# Altium PCB CC_EXP.PcbDoc
Units mm, origin at the board's own origin, x right, y up, seen from the top; angles counter-clockwise.
Board outline 30 x 30 mm, 2 copper layers (Top Layer, Bottom Layer), stack 1.569 mm thick; 4 components, 8 nets, 22 pads, 0 vias.
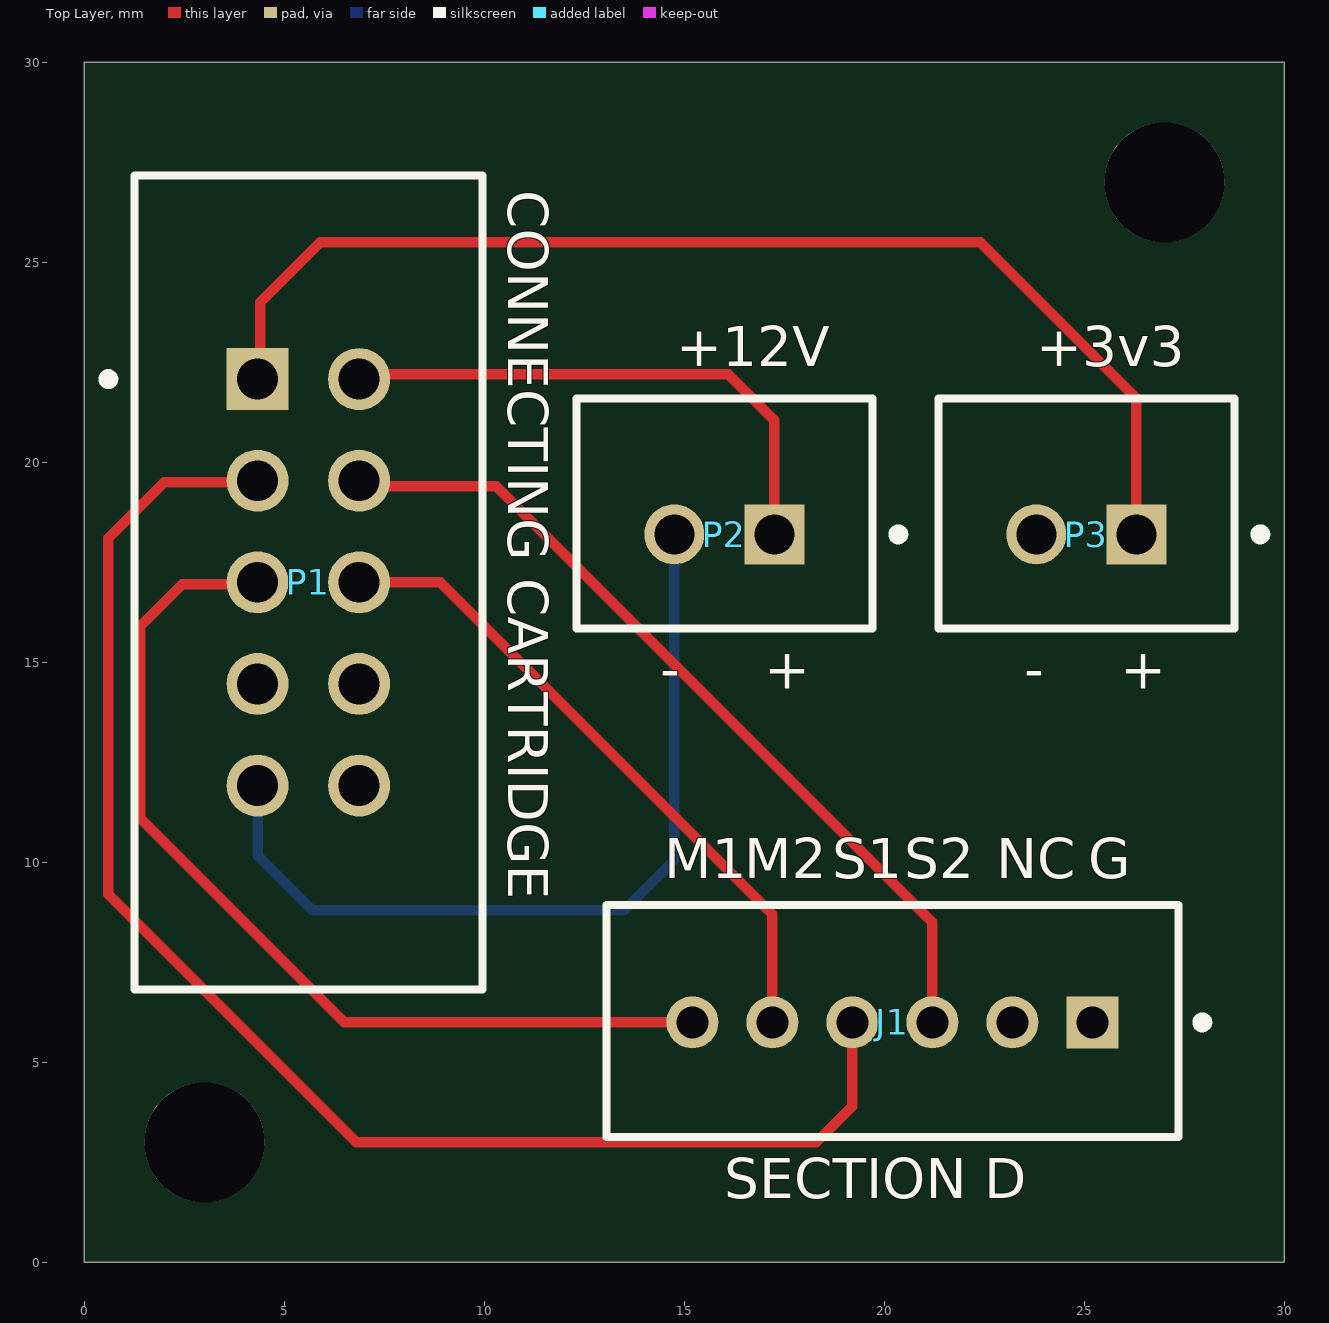
[diagram p0: Top Layer view]
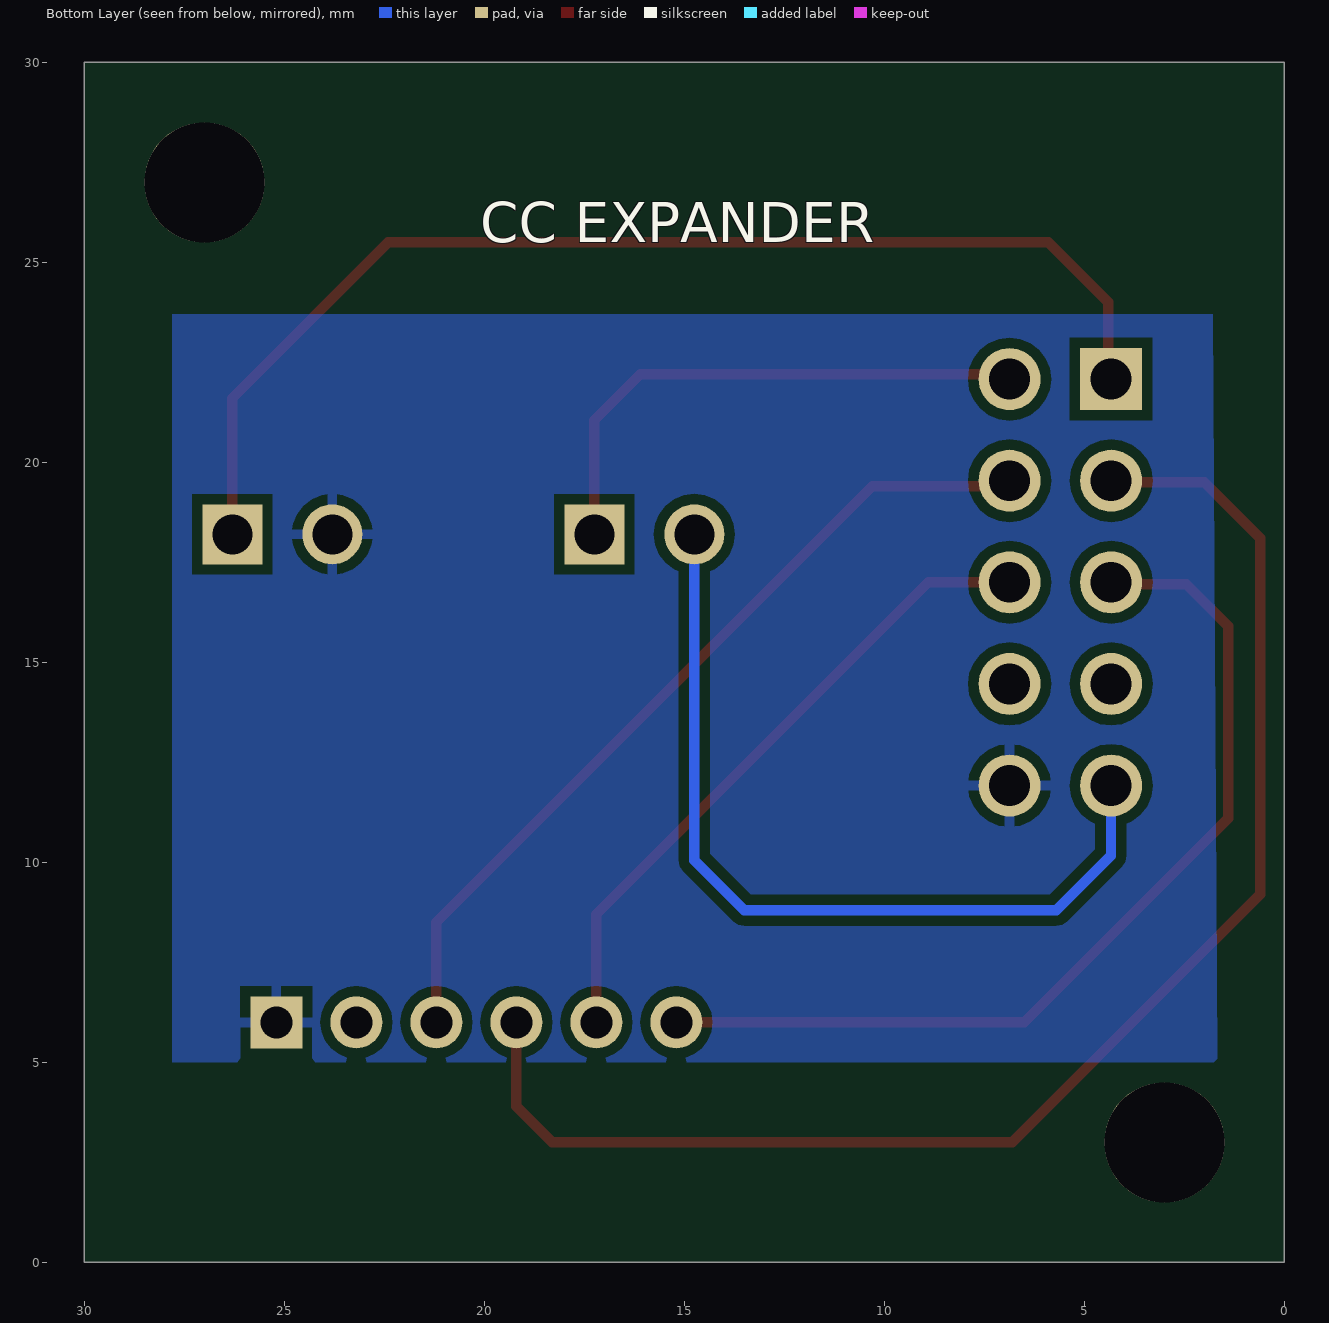
[diagram p1: Bottom Layer view, seen from below]
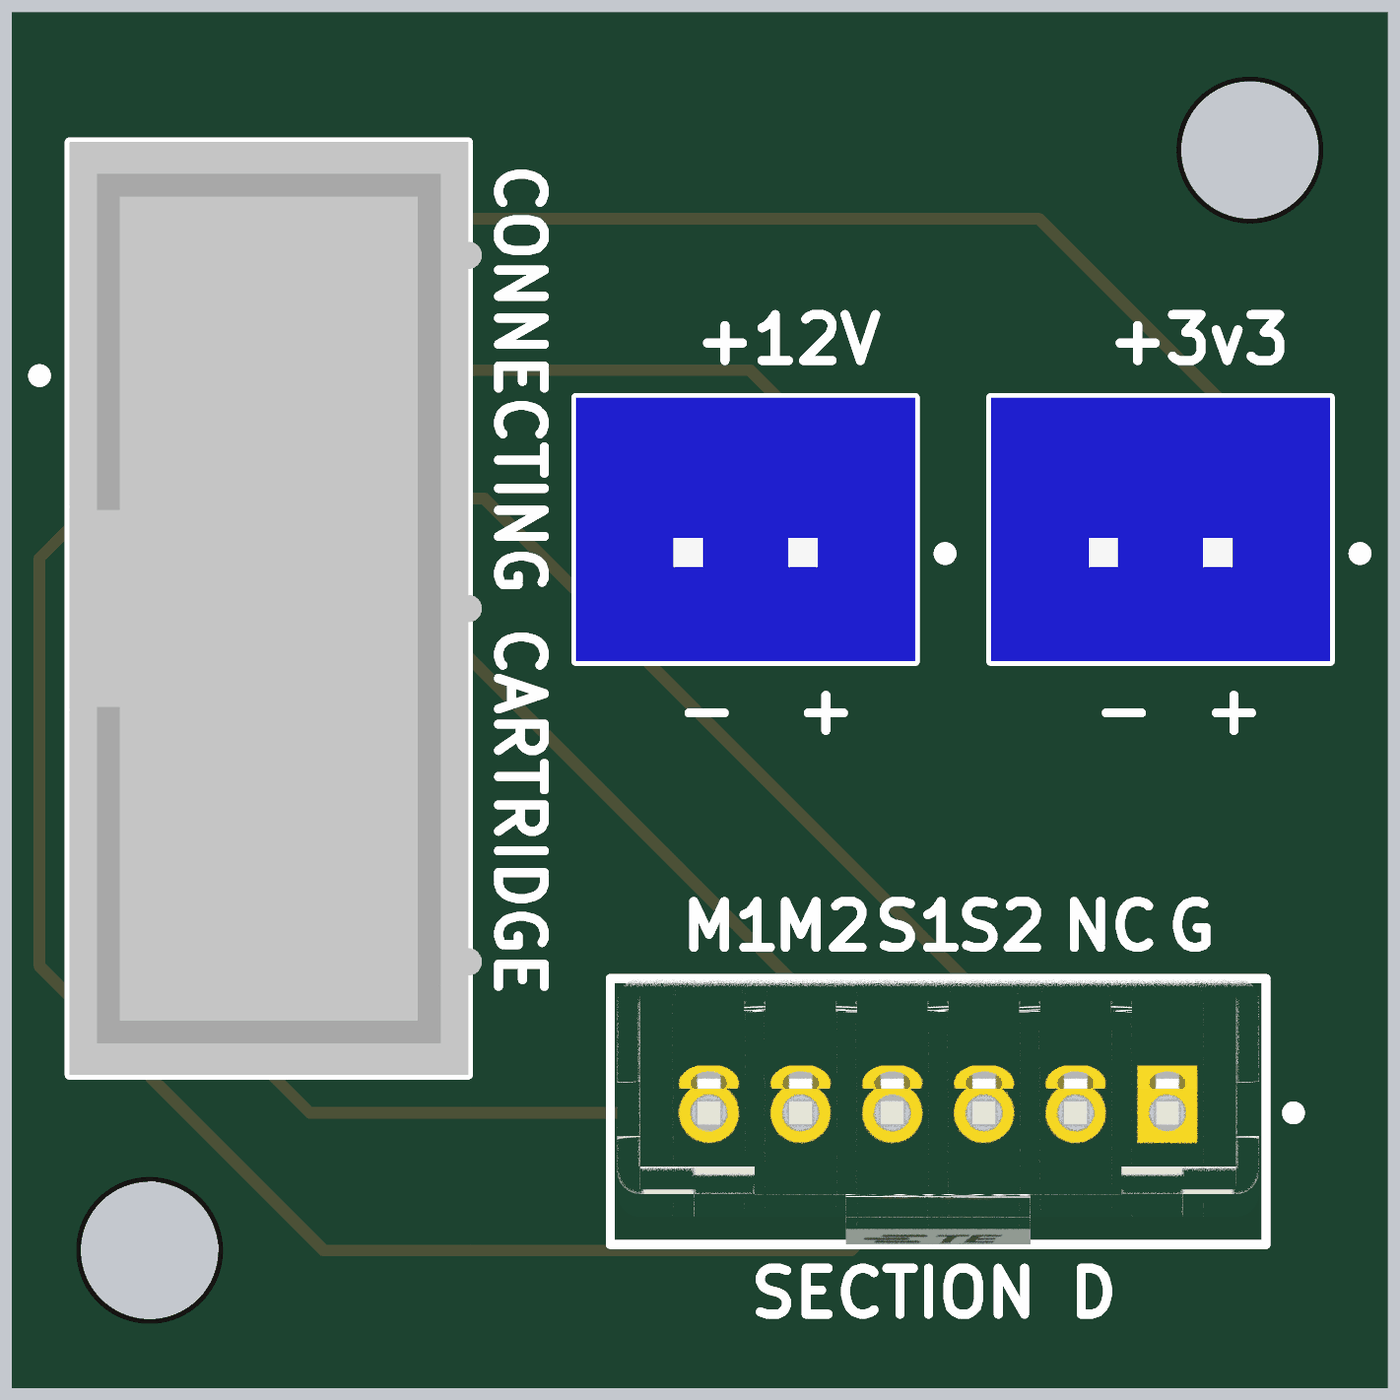
[diagram p2: 3D render of the assembled board from above, using the file's embedded part models]

## Layer stack, top to bottom
Top Solder: solder mask 0.0254, SM-001, Dk 4
Top Layer: signal copper 0.035
Dielectric 1: core 1.4986, Core-043, Dk 4.3
Bottom Layer: signal copper 0.035
Bottom Solder: solder mask 0.0254, SM-001, Dk 4

## Board outline
0,0 30,0 30,30 0,30

## Design rules (kind name [scope] priority, off if disabled: settings)
Clearance [All] p1: gap=0.254 ignorepadtopadclearanceinfootprint=FALSE except(0: Arc-Hole Track-Hole SMDPad-Hole THPad-Hole Via-Hole Fill-Hole Poly-Hole Region-Hole Text-Hole)
PolygonConnect [All] p1: connectstyle=Relief reliefconductorwidth=0.254 reliefentries=4 polygonreliefangle="90 Angle" airgapwidth=0.254
RoutingVias [All] p1: holewidth=0.711 width=1.27 viastyle="Through Hole" minholewidth=0.711 minwidth=1.27 maxholewidth=0.711 maxwidth=1.27
SolderMaskExpansion [All] p1: expansion=0.102 istentingtop=FALSE
Width [All] p1: maxlimit=0.254 minlimit=0.254 preferedwidth=0.254
30 further rules are at their usual default settings.

## Components (designator, comment, footprint, x,y, rotation, side; value= is the part's Value field where it differs from the comment)
J1 "1735446-6" FP-1735446-6-MFG 20.2,6.03 r0 top
P1 "1-1634688-0" TECO-1-1634688-0-10_V 5.6,17 r270 top
P2 "B2B-XH-A(LF)(SN)" JST-B2B-XH-A_V 16,18.2 r180 top
P3 "B2B-XH-A(LF)(SN)" JST-B2B-XH-A_V 25.05,18.2 r180 top

## Footprints (in the part's own frame and the unit in brackets; to place one, negate y for a bottom-side part, rotate by r counter-clockwise, add the part's x,y. Pads: shape width x height; smd on the part's side, far side on the other; paste and mask are expansions set on the pad)
FP-1735446-6-MFG [mm]
  rect 1.3x1.3 hole 0.8 paste-1000 mask+0: 1(5,-0.03)
  round 1.3 hole 0.8 paste-1000 mask+0: 2(3,-0.03) 3(1,-0.03) 4(-1,-0.03) 5(-3,-0.03) 6(-5,-0.03)
  silkscreen extent -7.15,-2.9 7.88,2.9, body extent -7.25,-3 7.25,3, height 0.25
JST-B2B-XH-A_V [mm] "Header, 2-Leads, Body 7.4x5.75mm, Pitch 2.5mm"
  rect 1.5x1.5 hole 1: 1(-1.25,0)
  round 1.5 hole 1: 2(1.25,0)
  silkscreen extent -4.47,-3.4 3.7,2.35, body extent -3.7,-3.4 3.7,2.35, height 7
TECO-1-1634688-0-10_V [mm] "10-Pin Connector, Body 20.35x8.7mm, Pitch 2.54mm"
  rect 1.55x1.55 hole 1.02: 1(-5.08,-1.27)
  round 1.55 hole 1.02: 2(-5.08,1.27) 3(-2.54,-1.27) 4(-2.54,1.27) 5(0,-1.27) 6(0,1.27) 7(2.54,-1.27) 8(2.54,1.27) 9(5.08,-1.27) 10(5.08,1.27)
  silkscreen extent -10.18,-5.12 10.18,4.35, body extent -10.17,-4.35 10.18,4.65, height 9

## Part data
J1: library part CMP-03369-000087-1, "CONN HEADER VERT 6POS 2MM", Current Rating=3A, Manufacturer=TE, Temperature="-25°C to +85°C", Temperature Range High=+85°C, Temperature Range Low=-25°C, Voltage Rating=100V, Automotive=No, Category=Conn, ComponentLink2Description=Datasheet, ComponentLink2URL=https://www.te.com/usa-en/product-1735446-6.html, Conn Gender=Male, Conn Orientation=Vertical, Contact Material=Tin,Nickel, Device Class L1=Connectors, Device Class L2="Headers and Wire Housings", Device Class L3=unset, Digikey Description="CONN HEADER VERT 6POS 2MM", Height=6.37mm, Lead Free=Yes, Manufacturer Part Number=1735446-6, Mouser Description="Headers & Wire Housings 6 POS HDR VERT 2.0mm", Number of Contacts=6, Number Of Rows=1, Octopart=https://octopart.com/1735446-6-te+connectivity-42205942, Package=1735446-6, Pitch=2mm, RoHS=TRUE
P1: library part CMP-2000-05854-1, "Male Header, Pitch 2.54 mm, 2 x 5 Postion, Height 9.15 mm, Tail Length 3.2 mm, -40 to 105 degC, RoHS, Bulk", Manufacturer="TE Connectivity", Package Description="10-Pin Connector, Body 20.35 x 8.7 mm, Pitch 2.54 mm", Package Version="Rev. C2, 02/2011", Contact Material=Brass, Contact Plating=GoldPlatedContacts, Contact Termination Type=ThroughHole, Datasheet URL=https://datasheet.ciiva.com/6831/eng-cd-1634688-c2-6831201.pdf, Datasheet Version="Rev. C2, 02/2011", Gender=Header, Manufacturer URL=http://www.te.com/, Mounting Technology=ThroughHole, No. of Contacts=10Contacts, No. of Positions=10, No. of Rows=2, Orientation=Straight, Package Reference=1-1634688-0, Package URL=https://datasheet.ciiva.com/6831/eng-cd-1634688-c2-6831201.pdf, PartNumber=1-1634688-0, Pitch=2.54mm, Pitch Spacing=2.54mm, Product Range=-, SVHC=ToBeAdvised
P2 P3: library part CMP-2000-05888-1, "Male Header, Pitch 2.5 mm, 1 x 2 Position, Height 7 mm, Tail Length 3.4 mm, -25 to 85 degC, RoHS, Bulk", Manufacturer=JST, Package Description="Male Header, Pitch 2.5 mm, 1 x 2 Position, Height 7 mm, Tail Length 3.4 mm", Package Reference=B2B-XH-A, Datasheet URL=http://www.jst-mfg.com/product/pdf/eng/eXH.pdf, Datasheet Version=05/2016, Manufacturer URL=http://www.jst.com/home2.html, Mounting Technology=ThroughHole, No of Positions=2, Pitch=2.5mm, Style/Orientation=StraightHeader/Plug, Termination=Crimp, Type=ShroudedHeader

## Free pads (board coordinates)
  round 3 hole 3 unplated: ""(3,3) ""(27,27)

## Nets (pads, with @x,y where several pads share a name; then routed paths per layer and width w, separated by ;. In a path a pad name is that pad's centre, name@x,y a point inside that pad or via, vN(x,y) a via of type N, cw(c..) or ccw(c..) an arc to the next point about the centre after c; other vN are vias at no path point)
+3V3: P1.1 P3.1 | length 29.5
  Top Layer w0.254: P1.1 4.4,22.15 4.4,24 5.9,25.5 22.4,25.5 26.3,21.6 P3.1
+12V: P1.2 P2.1 | length 13.8
  Top Layer w0.254: P1.2 6.99,22.2 16.1,22.2 17.25,21.05 P2.1
"CONN M1": J1.6 P1.5 | length 24.1
  Top Layer w0.254: P1.5 4.28,16.95 2.45,16.95 1.4,15.9 1.4,11.1 6.5,6 J1.6
"CONN M2": J1.5 P1.6 | length 16.5
  Top Layer w0.254: P1.6 8.9,17 17.2,8.7 J1.5
"CONN SW1": J1.4 P1.3 | length 36.9
  Top Layer w0.254: P1.3 4.29,19.5 2,19.5 0.6,18.1 0.6,9.2 6.8,3 18.3,3 19.2,3.9 J1.4
"CONN SW2": J1.3 P1.4 | length 21.4
  Top Layer w0.254: P1.4 7.01,19.4 10.3,19.4 21.2,8.5 J1.3
GND: J1.1 P1.10 P3.2
PGND: P1.9 P2.2 | length 21.4
  Bottom Layer w0.254: P1.9 4.336,11.914 4.336,10.164 5.7,8.8 13.5,8.8 14.75,10.05 P2.2
pads on no net: J1.2 P1.7 P1.8

## Polygon pours and split planes (outlines as drawn)
GND on Bottom Layer "GND_L02_P000" (solid, pour order 0): 1.792,23.7 27.8,23.7 27.8,5 1.68,5

## Silkscreen, mask and mechanical layers (free items; w line width, h text height)
Top Overlay:
  text "CONNECTING CARTRIDGE" at 10.6,26.8 h1 r270
  text "+12V" at 14.8,22.4 h1
  text "+3v3" at 23.8,22.4 h1
  text "-" at 14.4,14.333 h1
  text "+" at 17,14.333 h1
  text "-" at 23.5,14.333 h1
  text "+" at 25.9,14.333 h1
  text "M1" at 14.5,9.6 h1
  text "M2" at 16.5,9.6 h1
  text "S1" at 18.7,9.6 h1
  text "S2" at 20.5,9.6 h1
  text "NC" at 22.8,9.6 h1
  text "G" at 25.1,9.6 h1
  text "SECTION D" at 16,1.6 h1
Bottom Overlay:
  text "CC EXPANDER" at 20.1,25.5 h1